# EAGLE board wemos Atmega 32 sensor tes 2 (EAGLE 9.6.2)
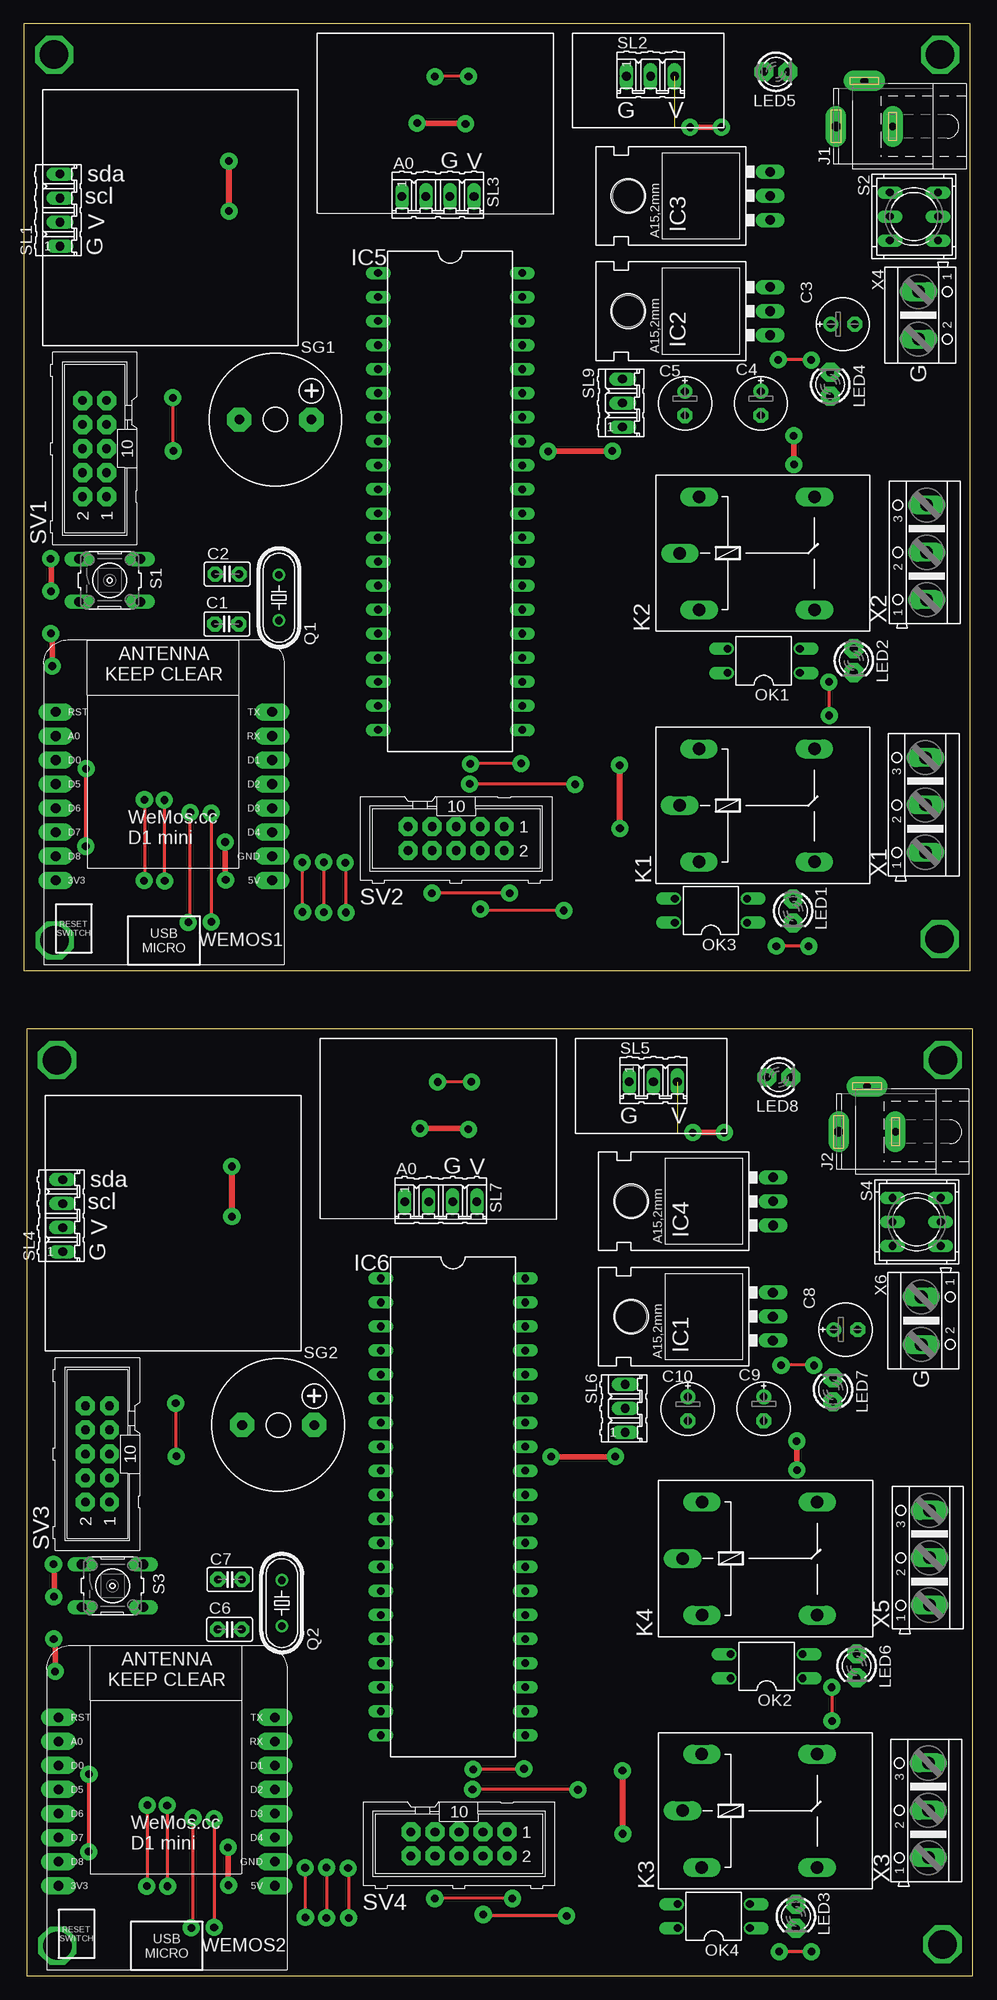
[diagram p0: board, top side]
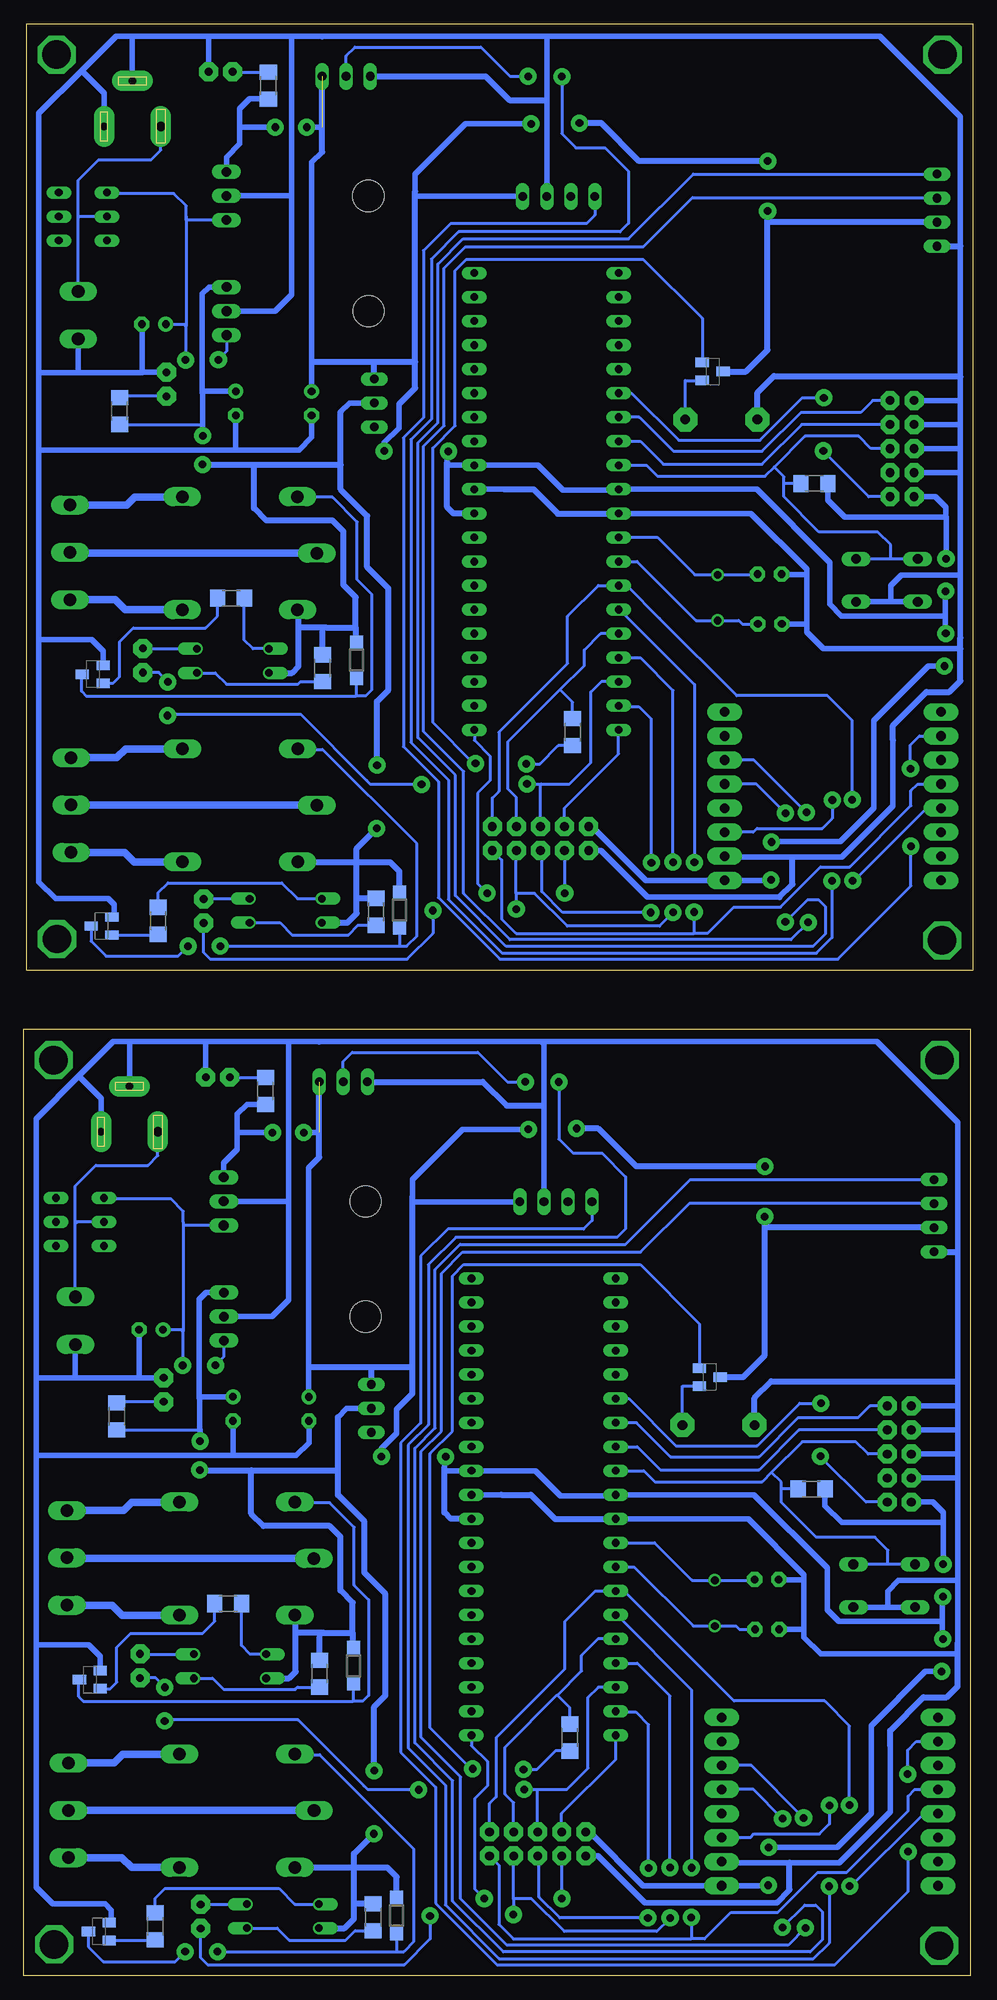
[diagram p1: board, bottom side, seen from below]

Size 100.3 x 206.2 mm. Coordinates in mm from the lower left corner, seen from the top.
Outline: 0,106.2 100,106.2 100,206.2 0,206.2 0,106.2
Outline: 0.3,0 100.3,0 100.3,100 0.3,100 0.3,0
Copper layers (1*16): Top 0.035mm / dielectric 1.5mm / Bottom 0.035mm
Design rules "default *": minimum track width 6mil, minimum drill 0.35mm, track to track 12mil, track to pad 12mil, pad to pad 12mil, via to via 12mil, smd to smd 12mil, copper to edge 40mil, drill to drill 6mil, minimum pad ring 10mil, minimum via ring 8mil, stop-mask expansion 4mil, vias tented up to drill 0mil, thermal gap 10mil

## Footprints (pad centres in the part's own frame; a part is rotated, then mirrored left to right if it is on the bottom)
C2.5-2 = drill 0.813 pad 1.6 octagon: 1 -1.27,0; 2 1.27,0
E2,5-6E = drill 0.813 pad 1.575: + -1.27,0 | drill 0.813 pad 1.575 octagon: - 1.27,0
SOD123 = smd 1.4 x 1.4: A 1.9,0; C -1.9,0
78XXL = drill 1.016 long: GND 0,-3.81; IN -2.54,-3.81; OUT 2.54,-3.81 | hole 3.302: 0,11.176
DIL40 = drill 0.813 long: 1 -24.13,-7.62; 2 -21.59,-7.62; 3 -19.05,-7.62; 4 -16.51,-7.62; 5 -13.97,-7.62; 6 -11.43,-7.62; 7 -8.89,-7.62; 8 -6.35,-7.62; 9 -3.81,-7.62; 10 -1.27,-7.62; 11 1.27,-7.62; 12 3.81,-7.62; 13 6.35,-7.62; 14 8.89,-7.62; 15 11.43,-7.62; 16 13.97,-7.62; 17 16.51,-7.62; 18 19.05,-7.62; 19 21.59,-7.62; 20 24.13,-7.62; 21 24.13,7.62; 22 21.59,7.62; 23 19.05,7.62; 24 16.51,7.62; 25 13.97,7.62; 26 11.43,7.62; 27 8.89,7.62; 28 6.35,7.62; 29 3.81,7.62; 30 1.27,7.62; 31 -1.27,7.62; 32 -3.81,7.62; 33 -6.35,7.62; 34 -8.89,7.62; 35 -11.43,7.62; 36 -13.97,7.62; 37 -16.51,7.62; 38 -19.05,7.62; 39 -21.59,7.62; 40 -24.13,7.62
SPC4078 = drill 0.8 pad 2.184 long: 1 -3,0; 2 0,-4.8 | drill 1 pad 2.184 long: 3 3,0
G5LE = drill 1.321 long: 1 -7.493,-5.969; 2 -7.493,5.969; O 4.699,5.969; P -9.525,0; S 4.699,-5.969
LED3MM = drill 0.813 pad 2 octagon: A -1.27,0; K 1.27,0
DIL04 = drill 0.813 offset: 1 -1.27,-3.81; 2 1.27,-3.81; 3 1.27,3.81; 4 -1.27,3.81
HC49/S = drill 0.813: 1 -2.413,0; 2 2.413,0
R1206 = smd 1.6 x 1.803: 1 -1.422,0; 2 1.422,0
B3F-10XX = drill 1.016 long: 1 -3.251,2.261; 2 3.251,2.261; 3 -3.251,-2.261; 4 3.251,-2.261
9077-2 = drill 0.813 long: 1 -2.54,2.54; 2 0,2.54; 3 2.54,2.54; 4 -2.54,-2.54; 5 0,-2.54; 6 2.54,-2.54
F/CM12P = drill 1.016 pad 2.54 octagon: + 3.81,0; - -3.81,0
04P = drill 0.914 long: 1 -3.81,0; 2 -1.27,0; 3 1.27,0; 4 3.81,0
03P = drill 0.914 long: 1 -2.54,0; 2 0,0; 3 2.54,0
ML10 = drill 0.914 pad 2 octagon: 1 -5.08,-1.27; 2 -5.08,1.27; 3 -2.54,-1.27; 4 -2.54,1.27; 5 0,-1.27; 6 0,1.27; 7 2.54,-1.27; 8 2.54,1.27; 9 5.08,-1.27; 10 5.08,1.27
SOT23-BEC = smd 1 x 1.4: B -0.95,-1.1; C 0,1.1; E 0.95,-1.1
WEMOS-D1-MINI = drill 1.016 pad 1.829 long: 3V3 -10.16,-10.16; 5V 12.7,-10.16; A0 -10.16,5.08; D0 -10.16,2.54; D1 12.7,2.54; D2 12.7,0; D3 12.7,-2.54; D4 12.7,-5.08; D5 -10.16,0; D6 -10.16,-2.54; D7 -10.16,-5.08; D8 -10.16,-7.62; GND 12.7,-7.62; RESET -10.16,7.62; RX 12.7,5.08; TX 12.7,7.62
AK500/3 = drill 1.321 long: 1 -5.004,0; 2 0,0; 3 5.004,0
AK500/2 = drill 1.321 long: 1 -2.515,0; 2 2.515,0

## Placement (x,y rotation side)
C1  22PF  [C2.5-2]  21.46,142.79 0 top
C2  22PF  [C2.5-2]  21.5,148.07 0 top
C3  100uF/16V  [E2,5-6E]  86.55,174.46 0 top
C4  100uF/16V  [E2,5-6E]  77.89,166.09 270 top
C5  100uF/16V  [E2,5-6E]  69.87,166.09 270 top
C6  22PF  [C2.5-2]  21.76,36.59 0 top
C7  22PF  [C2.5-2]  21.8,41.87 0 top
C8  100uF/16V  [E2,5-6E]  86.85,68.26 0 top
C9  100uF/16V  [E2,5-6E]  78.19,59.9 270 top
C10  100uF/16V  [E2,5-6E]  70.17,59.89 270 top
D1  1N4148  [SOD123]  60.59,112.56 270 bottom
D2  1N4148  [SOD123]  65.13,138.96 270 bottom
D3  1N4148  [SOD123]  60.89,6.37 270 bottom
D4  1N4148  [SOD123]  65.43,32.76 270 bottom
IC1  L7805  [78XXL]  75.35,69.63 90 top
IC2  L7805  [78XXL]  75.05,175.83 90 top
IC3  L7805  [78XXL]  75.06,188 90 top
IC4  L7805  [78XXL]  75.36,81.8 90 top
IC5  MEGA32-P  [DIL40]  45.07,155.74 270 top
IC6  MEGA32-P  [DIL40]  45.37,49.54 270 top
J1  VIN 6-12VDC  [SPC4078]  88.82,195.35 180 top
J2  VIN 6-12VDC  [SPC4078]  89.12,89.15 180 top
K1  G5L  [G5LE]  78.84,123.63 0 top
K2  G5L  [G5LE]  78.85,150.27 0 top
K3  G5L  [G5LE]  79.14,17.43 0 top
K4  G5L  [G5LE]  79.15,44.07 0 top
LED1  RED  [LED3MM]  81.29,112.47 270 top
LED2  RED  [LED3MM]  87.7,138.93 270 top
LED3  RED  [LED3MM]  81.59,6.27 270 top
LED4  RED  [LED3MM]  85.21,168.1 90 top
LED5  RED  [LED3MM]  79.49,201.12 0 top
LED6  RED  [LED3MM]  88,32.73 270 top
LED7  RED  [LED3MM]  85.51,61.9 90 top
LED8  RED  [LED3MM]  79.79,94.92 0 top
OK1  [DIL04]  78.19,138.9 90 top
OK2  [DIL04]  78.49,32.7 90 top
OK3  [DIL04]  72.61,112.5 90 top
OK4  [DIL04]  72.91,6.31 90 top
Q1  16MHZ  [HC49/S]  26.97,145.57 90 top
Q2  16MHZ  [HC49/S]  27.27,39.37 90 top
R1  10K  [R1206]  16.76,157.63 0 bottom
R2  1K  [R1206]  68.74,138.12 270 bottom
R3  1K  [R1206]  78.4,145.52 180 bottom
R4  10K  [R1206]  17.06,51.43 0 bottom
R5  1K  [R1206]  42.6,25.17 270 bottom
R6  1K  [R1206]  90.17,165.29 270 bottom
R7  1K  [R1206]  74.45,199.66 270 bottom
R8  1K  [R1206]  63.06,112.39 270 bottom
R9  1K  [R1206]  86.09,111.44 270 bottom
R10  1K  [R1206]  69.04,31.92 270 bottom
R11  1K  [R1206]  78.7,39.32 180 bottom
R12  1K  [R1206]  90.47,59.09 270 bottom
R13  1K  [R1206]  74.75,93.46 270 bottom
R14  1K  [R1206]  63.37,6.19 270 bottom
R15  1K  [R1206]  86.39,5.24 270 bottom
R18  1K  [R1206]  42.3,131.37 270 bottom
S1  RESET  [B3F-10XX]  9.09,147.4 0 top
S2  POWER ON/OFF  [9077-2]  94.05,185.83 90 top
S3  RESET  [B3F-10XX]  9.39,41.2 0 top
S4  POWER ON/OFF  [9077-2]  94.35,79.63 90 top
SG1  BUZZER  [F/CM12P]  26.59,164.38 0 top
SG2  BUZZER  [F/CM12P]  26.89,58.18 0 top
SL1  I2C  [04P]  3.82,186.5 90 top
SL2  DHT22  [03P]  66.23,200.64 0 top
SL3  MQ135  [04P]  43.76,187.96 0 top
SL4  I2C  [04P]  4.12,80.3 90 top
SL5  DHT22  [03P]  66.53,94.44 0 top
SL6  SWITCH POWER  [03P]  63.56,59.94 90 top
SL7  MQ135  [04P]  44.06,81.76 0 top
SL9  SWITCH POWER  [03P]  63.27,166.13 90 top
SV1  ISP PORT  [ML10]  7.49,161.32 90 top
SV2  PORTD  [ML10]  45.7,120.13 180 top
SV3  ISP PORT  [ML10]  7.79,55.12 90 top
SV4  PORTD  [ML10]  45.99,13.93 180 top
T1  -  [SOT23-BEC]  92.07,110.89 90 bottom
T2  -  [SOT23-BEC]  93,137.48 90 bottom
T3  C9013  [SOT23-BEC]  27.5,169.46 270 bottom
T4  -  [SOT23-BEC]  92.37,4.69 90 bottom
T5  -  [SOT23-BEC]  93.3,31.28 90 bottom
T6  C9013  [SOT23-BEC]  27.8,63.26 270 bottom
WEMOS1  D1 MINI  [WEMOS-D1-MINI]  13.55,125.88 0 top
WEMOS2  D1 MINI  [WEMOS-D1-MINI]  13.85,19.68 0 top
X1  OUT  [AK500/3]  95.28,123.67 90 top
X2  OUT  [AK500/3]  95.41,150.36 90 top
X3  OUT  [AK500/3]  95.58,17.47 90 top
X4  VIN 6-12VDC  [AK500/2]  94.54,175.4 270 top
X5  OUT  [AK500/3]  95.71,44.16 90 top
X6  VIN 6-12VDC  [AK500/2]  94.84,69.2 270 top

## Library data of the parts
C1 C2 C6 C7 = capacitor-wima
C3-C5 C8-C10 = rcl; SPICEPREFIX: C
D1-D4 = diode
IC1-IC4 = v-reg
IC5 IC6 = atmel; MPN: ATMEGA32-16PU; OC_FARNELL: 1661729; OC_NEWARK: 51P1794
J1 J2 = con-jack; OC_FARNELL: unknown; OC_NEWARK: unknown
K1-K4 = relay; OC_FARNELL: unknown; OC_NEWARK: unknown
LED1-LED8 = led3mm_new
OK1-OK4 = optocoupler; MPN: PC817X4J000F; OC_FARNELL: 9707727; OC_NEWARK: 97K7059
Q1 Q2 = crystal; OC_FARNELL: 1667008; OC_NEWARK: unknown
R1-R15 R18 = rcl; SPICEPREFIX: R
S1 S3 = switch-omron; MPN: B3F-1000; OC_FARNELL: 176432; OC_NEWARK: 36M3542
S2 S4 = switch-misc
SG1 SG2 = buzzer; OC_FARNELL: unknown; OC_NEWARK: unknown
SL1-SL7 SL9 = con-amp-quick; OC_FARNELL: unknown; OC_NEWARK: unknown
SV1-SV4 = con-mlnew; OC_FARNELL: unknown; OC_NEWARK: unknown
T1-T6 = transistor
WEMOS1 WEMOS2 = Eagle Mixed Library
X1-X6 = con-ptr500; OC_FARNELL: unknown; OC_NEWARK: unknown

## Nets
5V: C5.+ IC3.OUT IC5.10 IC5.30 IC5.32 R1.2 R7.2 SL1.2 SL2.3 SL3.4 SL9.3 SV1.2 SV2.9 T3.C WEMOS1.5V
5V1: C10.+ IC4.OUT IC6.10 IC6.30 IC6.32 R4.2 R13.2 SL4.2 SL5.3 SL6.3 SL7.4 SV3.2 SV4.9 T6.C WEMOS2.5V
5VA: C4.+ D1.C D2.C IC2.OUT K1.1 K2.1 OK1.4 OK3.4 R2.1 R6.2 R8.1 SL9.2
5VA1: C9.+ D3.C D4.C IC1.OUT K3.1 K4.1 OK2.4 OK4.4 R10.1 R12.2 R14.1 SL6.2
A0: SL3.1 WEMOS1.A0
A1: SL7.1 WEMOS2.A0
D1: SL1.3 WEMOS1.D1
D2: SL1.4 WEMOS1.D2
D3: SL4.3 WEMOS2.D1
D4: SL2.2 WEMOS1.D4
D5: SL4.4 WEMOS2.D2
D6: SL5.2 WEMOS2.D4
GND: C1.1 C2.1 C3.- C4.- C5.- IC2.GND IC3.GND IC5.11 IC5.31 J1.1 J1.2 LED4.K LED5.K S1.3 S1.4 SG1.- SL1.1 SL2.1 SL3.3 SV1.4 SV1.6 SV1.8 SV1.10 SV2.10 T1.E T2.E WEMOS1.GND X4.2
GND1: C6.1 C7.1 C8.- C9.- C10.- IC1.GND IC4.GND IC6.11 IC6.31 J2.1 J2.2 LED7.K LED8.K S3.3 S3.4 SG2.- SL4.1 SL5.1 SL7.3 SV3.4 SV3.6 SV3.8 SV3.10 SV4.10 T4.E T5.E WEMOS2.GND X6.2
MISO: IC5.7 SV1.9
MISO1: IC6.7 SV3.9
MOSI: IC5.6 SV1.1
MOSI1: IC6.6 SV3.1
N$1: J1.3 S2.2 X4.1
N$2: C3.+ IC2.IN IC3.IN S2.3
N$4: C2.2 IC5.12 Q1.2
N$5: LED4.A R6.1
N$8: LED5.A R7.1
N$10: C1.2 IC5.13 Q1.1
N$11: R18.2 T3.B
N$12: J2.3 S4.2 X6.1
N$13: C8.+ IC1.IN IC4.IN S4.3
N$14: SG1.+ T3.E
N$15: LED7.A R12.1
N$16: LED8.A R13.1
N$17: R5.2 T6.B
N$18: OK3.1 R8.2
N$19: LED1.A OK3.2
N$20: SG2.+ T6.E
N$21: OK4.1 R14.2
N$22: OK3.3 R9.1
N$23: R9.2 T1.B
N$24: LED3.A OK4.2
N$25: D1.A K1.2 T1.C
N$26: OK4.3 R15.1
N$27: D2.A K2.2 T2.C
N$28: R15.2 T4.B
N$29: R3.2 T2.B
N$30: OK1.3 R3.1
N$31: OK1.1 R2.2
N$32: LED2.A OK1.2
N$33: D3.A K3.2 T4.C
N$34: K2.P X2.2
N$35: K2.O X2.3
N$36: K2.S X2.1
N$37: K1.O X1.3
N$38: K1.S X1.1
N$39: K1.P X1.2
N$40: D4.A K4.2 T5.C
N$41: R11.2 T5.B
N$42: OK2.3 R11.1
N$43: OK2.1 R10.2
N$44: LED6.A OK2.2
N$45: K4.P X5.2
N$46: K4.O X5.3
N$47: K4.S X5.1
N$48: K3.O X3.3
N$49: K3.S X3.1
N$50: K3.P X3.2
N$55: C7.2 IC6.12 Q2.2
N$56: C6.2 IC6.13 Q2.1
PD0: IC5.14 SV2.1 WEMOS1.D6
PD1: IC5.15 SV2.2 WEMOS1.D5
PD2: IC5.16 R18.1 SV2.3
PD3: IC5.17 LED1.K SV2.4
PD4: IC5.18 LED2.K SV2.5
PD5: IC5.19 SV2.6
PD6: IC5.20 SV2.7
PD7: IC5.21 SV2.8
PD8: IC6.18 LED6.K SV4.5
PD9: IC6.17 LED3.K SV4.4
PD10: IC6.16 R5.1 SV4.3
PD11: IC6.14 SV4.1 WEMOS2.D6
PD12: IC6.15 SV4.2 WEMOS2.D5
PD13: IC6.19 SV4.6
PD14: IC6.20 SV4.7
PD15: IC6.21 SV4.8
RST: IC5.9 R1.1 S1.1 S1.2 SV1.5
RST1: IC6.9 R4.1 S3.1 S3.2 SV3.5
SCK: IC5.8 SV1.7
SCK1: IC6.8 SV3.7

## Tracks (layer width: path | path; a pad name or v marks a point on that pad's centre or on a via)
5V  (via drill 0.8 pad 1.8)  (1 unrouted)
  Top 0.6: v70.4,195.26 v73.72,195.26 | v21.29,119.76 21.29,115.82 v21.34,115.77 | v2.87,141.78 3.02,141.64 v3.02,138.34 | v2.88,146.25 2.91,146.28 2.91,149.61 v2.85,149.68 | v41.58,195.7 46.59,195.7 v46.68,195.61 | v62.2,161.06 62.18,161.04 55.44,161.04 v55.42,161.02
  Top 0.61: v21.7,186.4 21.7,191.68 v21.68,191.69
  Bottom 0.6: IC3.OUT 78.87,192.09 77.46,193.49 77.46,195.17 | 77.46,195.17 77.46,197.21 76.41,198.26 74.47,198.26 R7.2 | 68.77,195.26 v70.4,195.26 | v73.72,195.26 77.37,195.26 77.46,195.17 | C5.+ 69.87,170.46 69.87,191.55 68.79,192.63 | SV2.9 40.23,121.4 34.55,115.72 WEMOS1.5V 21.39,115.72 v21.34,115.77 | v21.29,119.76 21.25,119.79 14.02,119.79 10.46,123.35 10.46,132.6 4.72,138.34 v3.02,138.34 | v2.87,141.78 2.92,141.84 2.92,143.64 | v2.88,146.25 2.92,146.21 2.92,143.64 | v2.85,149.68 2.85,154.08 2.87,154.08 | 2.87,154.08 2.87,155.13 3.97,156.24 5.07,156.24 SV1.2 | 2.92,143.64 13.89,143.64 15.11,144.87 15.11,149.29 22.83,157.01 IC5.10 37.54,156.91 43.3,156.91 45.94,159.55 IC5.32 55.56,159.55 55.56,159.87 55.56,160.88 v55.42,161.02 | v46.68,195.61 53.61,195.61 58.93,190.3 58.93,188.49 58.93,188.13 58.76,187.96 SL3.4 | 58.93,167.72 60.63,166.02 60.63,163.5 62.2,161.93 v62.2,161.06 | R1.2 15.34,155.86 13.56,154.08 2.87,154.08
  Bottom 0.61: IC5.30 54.9,154.47 55.56,155.13 55.56,159.87 | 63.31,170.46 69.87,170.46 | SL9.3 63.27,170.42 63.31,170.46 | 58.93,170.46 63.31,170.46 | 58.93,167.72 58.93,170.46 | 58.93,170.46 58.93,188.49 | T3.C 23.98,169.46 21.7,171.74 21.7,185.29 | 21.7,185.29 v21.7,186.4 | v21.68,191.69 35.27,191.69 39.28,195.7 v41.58,195.7 | SL1.2 21.63,185.23 21.7,185.29 | 68.79,192.63 68.77,192.65 SL2.3
5V1  (via drill 0.8 pad 1.8)  (1 unrouted)
  Top 0.6: v70.7,89.06 v74.02,89.06 | v21.59,13.56 21.59,9.62 v21.64,9.57 | v3.17,35.58 3.32,35.44 v3.32,32.14 | v3.18,40.05 3.21,40.08 3.21,43.41 v3.15,43.48 | v41.88,89.5 46.89,89.5 v46.98,89.41 | v62.5,54.86 62.48,54.84 55.74,54.84 v55.72,54.82
  Top 0.61: v22,80.2 22,85.47 v21.98,85.5
  Bottom 0.6: IC4.OUT 79.17,85.89 77.76,87.29 77.76,88.97 | 77.76,88.97 77.76,91.01 76.71,92.06 74.77,92.06 R13.2 | 69.07,89.06 v70.7,89.06 | v74.02,89.06 77.67,89.06 77.76,88.97 | C10.+ 70.17,64.26 70.17,85.35 69.09,86.43 | SV4.9 40.53,15.2 34.85,9.52 WEMOS2.5V 21.69,9.52 v21.64,9.57 | v21.59,13.56 21.55,13.59 14.32,13.59 10.76,17.15 10.76,26.4 5.02,32.14 v3.32,32.14 | v3.17,35.58 3.23,35.64 3.23,37.44 | v3.18,40.05 3.23,40.01 3.23,37.44 | v3.15,43.48 3.15,47.88 3.17,47.88 | 3.17,47.88 3.17,48.93 4.27,50.04 5.37,50.04 SV3.2 | 3.23,37.44 14.19,37.44 15.41,38.67 15.41,43.09 23.13,50.81 IC6.10 37.84,50.71 43.6,50.71 46.24,53.35 IC6.32 55.86,53.35 55.86,53.67 55.86,54.68 v55.72,54.82 | v46.98,89.41 53.91,89.41 59.23,84.1 59.23,82.29 59.23,81.93 59.06,81.76 SL7.4 | 59.23,61.52 60.93,59.82 60.93,57.3 62.5,55.73 v62.5,54.86 | R4.2 15.63,49.66 13.86,47.88 3.17,47.88
  Bottom 0.61: IC6.30 55.2,48.27 55.86,48.93 55.86,53.67 | 63.61,64.26 70.17,64.26 | SL6.3 63.56,64.22 63.61,64.26 | 59.23,64.26 63.61,64.26 | 59.23,61.52 59.23,64.26 | 59.23,64.26 59.23,82.29 | T6.C 24.28,63.26 22,65.54 22,79.09 | 22,79.09 v22,80.2 | v21.98,85.5 35.57,85.5 39.58,89.5 v41.88,89.5 | SL4.2 21.93,79.03 22,79.09 | 69.09,86.43 69.07,86.45 SL5.3
5VA  (via drill 0.8 pad 1.8)
  Top 0.6: v81.37,162.68 81.39,162.65 v81.39,159.64
  Top 0.61: v63,121.2 63,127.83
  Top 0.813: 63,127.83 v62.96,127.87
  Bottom 0.3: R6.2 81.39,163.87 | 71.26,144.2 K2.1 | 68.74,141.95 68.28,142.4
  Bottom 0.6: C4.+ 81.32,167.37 81.4,167.29 | IC2.OUT 80.73,178.37 81.44,177.66 81.44,167.25 81.4,167.29 | SL9.2 65.87,166.13 66.8,165.2 | 71.3,117.62 K1.1 | 65.1,113.76 65.05,113.81 | v81.37,162.68 81.37,163.87 81.39,163.87 81.4,163.87 81.4,167.29
  Bottom 0.61: OK3.4 66.09,111.23 65.1,112.22 65.1,113.76 65.1,117.59 65.1,119.1 v63,121.2 | R8.1 65.05,113.81 | D1.C 60.59,116.65 61.56,117.62 65.13,117.62 71.3,117.62 | v81.39,159.64 81.36,159.6 75.97,159.6 | OK1.4 71.96,137.63 71.26,138.34 71.26,142.4 | 71.26,142.4 71.26,144.2 | 65.23,142.4 68.28,142.4 71.26,142.4 | 65.23,142.4 65.23,140.96 | R2.1 68.74,141.95 | v62.96,127.87 62.96,134.62 61.77,135.81 61.77,146.55 63.99,148.77 63.99,154.19 66.8,156.99 66.8,159.59 | 66.8,159.59 66.8,165.2 | 66.8,159.59 66.81,159.6 75.97,159.6 | 65.23,142.4 65.23,145.61 66.52,146.9 66.52,152.57 67.67,153.72 74.67,153.72 75.97,155.02 75.97,159.6
  Bottom 0.813: D2.C 65.23,140.96 | 65.1,117.59 65.13,117.62
5VA1  (via drill 0.8 pad 1.8)
  Top 0.6: v81.67,56.48 81.69,56.45 v81.69,53.44
  Top 0.61: v63.3,15 63.3,21.63
  Top 0.813: 63.3,21.63 v63.26,21.67
  Bottom 0.3: R12.2 81.69,57.67 | 71.56,38 K4.1 | 69.04,35.75 68.58,36.2
  Bottom 0.6: C9.+ 81.62,61.17 81.7,61.09 | IC1.OUT 81.03,72.17 81.74,71.46 81.74,61.05 81.7,61.09 | SL6.2 66.17,59.94 67.1,59 | 71.6,11.42 K3.1 | 65.4,7.56 65.35,7.61 | v81.67,56.48 81.67,57.67 81.69,57.67 81.7,57.67 81.7,61.09
  Bottom 0.61: OK4.4 66.39,5.03 65.4,6.02 65.4,7.56 65.4,11.39 65.4,12.9 v63.3,15 | R14.1 65.35,7.61 | D3.C 60.89,10.45 61.86,11.42 65.43,11.42 71.6,11.42 | v81.69,53.44 81.66,53.4 76.27,53.4 | OK2.4 72.26,31.43 71.56,32.14 71.56,36.2 | 71.56,36.2 71.56,38 | 65.53,36.2 68.58,36.2 71.56,36.2 | 65.53,36.2 65.53,34.76 | R10.1 69.04,35.75 | v63.26,21.67 63.26,28.42 62.07,29.61 62.07,40.35 64.3,42.57 64.3,47.99 67.1,50.79 67.1,53.39 | 67.1,53.39 67.1,59 | 67.1,53.39 67.11,53.4 76.27,53.4 | 65.53,36.2 65.53,39.41 66.82,40.7 66.82,46.37 67.97,47.52 74.97,47.52 76.27,48.82 76.27,53.4
  Bottom 0.813: D4.C 65.53,34.76 | 65.4,11.39 65.43,11.42
A0  (via drill 0.8 pad 1.8)
  Top 0.305: v6.56,119.31 6.56,127.46 v6.6,127.5
  Bottom 0.305: SL3.1 39.95,185.97 40.84,185.09 55.19,185.09 58.05,182.22 58.05,164.58 60.17,162.47 60.17,129.82 56.48,126.13 56.48,113.87 50,107.39 14.28,107.39 6.56,115.11 v6.56,119.31 | v6.6,127.5 6.6,130.02 5.67,130.96 WEMOS1.A0
A1  (via drill 0.8 pad 1.8)
  Top 0.305: v6.86,13.11 6.86,21.26 v6.9,21.3
  Bottom 0.305: SL7.1 40.25,79.77 41.14,78.89 55.49,78.89 58.35,76.02 58.35,58.38 60.47,56.27 60.47,23.62 56.78,19.93 56.78,7.67 50.3,1.19 14.58,1.19 6.86,8.91 v6.86,13.11 | v6.9,21.3 6.9,23.82 5.96,24.76 WEMOS2.A0
D1  (via drill 0.8 pad 1.8)
  Top 0.305: v17.6,122.88 17.6,122.71 17.56,122.68 17.56,111.43 v17.4,111.27
  Bottom 0.305: WEMOS1.D1 23.13,128.42 v17.6,122.88 | v17.4,111.27 19.23,109.44 48.94,109.44 53.82,114.33 53.82,127.21 58.03,131.41 58.03,161.58 55.88,163.73 55.88,180.39 53.62,182.64 34.82,182.64 29.63,187.83 3.88,187.83 SL1.3
D2  (via drill 0.8 pad 1.8)
  Top 0.305: v19.82,111.32 v19.83,111.33 19.83,122.8 v19.82,122.81
  Bottom 0.305: v19.82,122.81 22.89,125.88 WEMOS1.D2 | v19.82,111.32 17.47,113.67 16.32,113.67 15.6,112.95 15.6,110.03 16.9,108.73 49.33,108.73 54.68,114.09 54.68,126.82 58.66,130.79 58.66,161.93 56.53,164.06 56.53,180.81 53.87,183.47 36.4,183.47 29.56,190.31 SL1.4
D3  (via drill 0.8 pad 1.8)
  Top 0.305: v17.9,16.68 17.9,16.51 17.86,16.48 17.86,5.23 v17.7,5.07
  Bottom 0.305: WEMOS2.D1 23.43,22.22 v17.9,16.68 | v17.7,5.07 19.53,3.24 49.24,3.24 54.12,8.12 54.12,21.01 58.33,25.21 58.33,55.38 56.17,57.53 56.17,74.19 53.92,76.44 35.12,76.44 29.93,81.63 4.18,81.63 SL4.3
D4  (via drill 0.8 pad 1.8)
  Top 0.305: v47,200.63 43.47,200.63 v43.45,200.61 | v14.87,124.2 14.87,115.69 v14.89,115.66
  Bottom 0.305: v47,200.63 v47.01,200.64 48.9,200.64 52,203.73 65.3,203.73 66.23,202.8 SL2.2 | v43.45,200.61 43.45,194.58 41.96,193.09 38.88,193.09 36.4,190.61 36.4,185.12 37.3,184.21 54.34,184.21 57.23,181.32 57.23,164.41 59.38,162.26 59.38,130.27 55.44,126.33 55.44,113.69 49.75,108.01 16.55,108.01 14.89,109.66 v14.89,115.66 | v14.87,124.2 14.87,122.25 15.93,121.19 22.83,121.19 23.22,120.8 WEMOS1.D4
D5  (via drill 0.8 pad 1.8)
  Top 0.305: v20.12,5.12 v20.13,5.12 20.13,16.6 v20.12,16.61
  Bottom 0.305: v20.12,16.61 23.19,19.68 WEMOS2.D2 | v20.12,5.12 17.77,7.48 16.62,7.48 15.9,6.75 15.9,3.83 17.2,2.53 49.63,2.53 54.98,7.89 54.98,20.62 58.96,24.59 58.96,55.73 56.83,57.86 56.83,74.61 54.17,77.27 36.7,77.27 29.86,84.11 SL4.4
D6  (via drill 0.8 pad 1.8)
  Top 0.305: v47.3,94.43 43.77,94.43 v43.75,94.41 | v15.16,18 15.16,9.49 v15.19,9.46
  Bottom 0.305: v47.3,94.43 v47.31,94.44 49.2,94.44 52.3,97.53 65.6,97.53 66.53,96.6 SL5.2 | v43.75,94.41 43.75,88.38 42.26,86.89 39.18,86.89 36.7,84.41 36.7,78.92 37.6,78.01 54.64,78.01 57.52,75.12 57.52,58.21 59.67,56.06 59.67,24.07 55.73,20.13 55.73,7.49 50.05,1.81 16.84,1.81 15.19,3.46 v15.19,9.46 | v15.16,18 15.16,16.05 16.23,14.98 23.13,14.98 23.52,14.6 WEMOS2.D4
GND
  Bottom 0.6: 88.89,204.88 90.53,204.88 94.19,201.23 | 88.89,204.88 80.85,204.88 | 80.85,204.88 72,204.88 | 72,204.88 68.7,204.88 | 68.7,204.88 45.28,204.88 | 45.28,204.88 9.86,204.88 1.32,196.34 1.32,190.32 1.33,190.31 1.32,190.3 1.32,182.7 1.32,168.87 1.32,166.44 | 1.33,141.33 1.33,147.97 | 8.46,130.52 8.46,123.54 13.85,118.16 19.08,118.16 26.15,118.16 WEMOS1.GND | 68.77,204.81 68.7,204.88 | 72,204.88 72,188.06 | 72,188.06 72,177.57 73.73,175.83 IC2.GND | IC3.GND 72.05,188 72,188.06 | J1.2 88.82,204.81 88.89,204.88 | 94.19,201.23 98.68,196.73 98.68,169.34 | C3.- 87.79,174.43 87.79,169.41 | LED4.K 87.83,169.37 87.79,169.41 | LED5.K 80.76,204.8 80.85,204.88 | 77.97,161.15 71.22,161.15 69.86,162.51 C5.- | C4.- 77.89,161.23 77.97,161.15 | J1.1 91.82,198.86 94.19,201.23 | 98.68,141.16 98.68,115.53 96.94,113.79 91.39,113.79 90.76,113.15 90.76,112.05 T1.E | SV2.10 39.31,118.86 34.38,113.93 20.44,113.93 | T2.E 91.9,139.93 93.13,141.16 98.68,141.16 | IC5.31 49.52,157.01 | SL3.3 45.03,198.16 45.03,204.63 45.28,204.88 | 17.56,148.01 17.56,148.58 23.45,154.47 IC5.11 | 17.56,148.01 17.56,142.81 | 17.56,142.81 17.56,141.96 15.79,140.19 1.33,140.19 | X4.2 94.54,169.34 | 87.79,169.41 87.79,169.34 94.54,169.34 | 94.54,169.34 98.68,169.34 | 98.68,169.34 98.68,161.2 | 98.68,161.2 98.68,141.16 | 98.68,161.2 98.63,161.15 77.97,161.15 | S1.4 8.7,145.14 | 8.7,145.14 S1.3 | 8.7,145.14 8.7,146.84 7.57,147.97 1.33,147.97 | 1.33,147.97 1.32,147.97 1.32,158.74 | C2.1 20.17,148.01 17.56,148.01 | C1.1 17.57,142.79 17.56,142.81 | 1.32,158.74 1.32,161.32 | 1.32,161.32 1.32,163.86 | 1.32,163.86 1.32,166.44 | SV1.4 1.36,158.78 1.32,158.74 | SV1.6 1.32,161.32
  Bottom 0.6: SV1.8 1.33,163.86 1.32,163.86 | SV1.10 1.36,166.4 1.32,166.44
  Bottom 0.61: SG1.- 22.78,167.23 21.01,168.99 1.45,168.99 1.32,168.87 | 1.33,141.33 1.33,140.19 1.33,136.78 2.49,135.62 4.93,135.62 8.46,132.09 8.46,130.52 | 49.52,157.01 46.42,157.01 43.85,154.44 37.47,154.44 IC5.11 | 20.44,113.93 19.08,115.29 19.08,118.16 | SL1.1 1.36,182.69 1.32,182.72 1.32,182.7 | SL2.1 51.5,200.64 48.98,198.12 45.08,198.12 45.03,198.16
GND1
  Bottom 0.6: 89.19,98.68 90.83,98.68 94.49,95.03 | 89.19,98.68 81.15,98.68 | 81.15,98.68 72.3,98.68 | 72.3,98.68 69,98.68 | 69,98.68 45.58,98.68 | 45.58,98.68 10.16,98.68 1.62,90.15 1.62,84.12 1.64,84.11 1.62,84.09 1.62,76.5 1.62,62.67 1.62,60.24 | 1.63,35.13 1.63,41.77 | 8.76,24.32 8.76,17.34 14.15,11.96 19.38,11.96 26.45,11.96 WEMOS2.GND | 69.07,98.61 69,98.68 | 72.3,98.68 72.3,81.86 | 72.3,81.86 72.3,71.37 74.03,69.63 IC1.GND | IC4.GND 72.35,81.8 72.3,81.86 | J2.2 89.12,98.62 89.19,98.68 | 94.49,95.03 98.98,90.53 98.98,63.14 | C8.- 88.09,68.23 88.09,63.21 | LED7.K 88.13,63.17 88.09,63.21 | LED8.K 81.06,98.59 81.15,98.68 | 78.27,54.95 71.52,54.95 70.16,56.31 C10.- | C9.- 78.19,55.03 78.27,54.95 | J2.1 92.12,92.66 94.49,95.03 | 98.98,34.96 98.98,9.33 97.24,7.59 91.69,7.59 91.06,6.95 91.06,5.85 T4.E | SV4.10 39.61,12.66 34.68,7.73 20.74,7.73 | T5.E 92.2,33.73 93.43,34.96 98.98,34.96 | IC6.31 49.82,50.81 | SL7.3 45.33,91.96 45.33,98.44 45.58,98.68 | 17.86,41.81 17.86,42.38 23.75,48.27 IC6.11 | 17.86,41.81 17.86,36.61 | 17.86,36.61 17.86,35.76 16.09,33.99 1.63,33.99 | X6.2 94.84,63.14 | 88.09,63.21 88.09,63.14 94.84,63.14 | 94.84,63.14 98.98,63.14 | 98.98,63.14 98.98,55 | 98.98,55 98.98,34.96 | 98.98,55 98.93,54.95 78.27,54.95 | S3.4 9,38.94 | 9,38.94 S3.3 | 9,38.94 9,40.64 7.87,41.77 1.63,41.77 | 1.63,41.77 1.62,41.77 1.62,52.54 | C7.1 20.47,41.81 17.86,41.81 | C6.1 17.88,36.59 17.86,36.61 | 1.62,52.54 1.62,55.12 | 1.62,55.12 1.62,57.66 | 1.62,57.66 1.62,60.24 | SV3.4 1.66,52.58 1.62,52.54 | SV3.6 1.62,55.12 | SV3.8 1.63,57.66 1.62,57.66 | SV3.10 1.66,60.2 1.62,60.24
  Bottom 0.61: SG2.- 23.08,61.03 21.31,62.79 1.75,62.79 1.62,62.67 | 1.63,35.13 1.63,33.99 1.63,30.58 2.79,29.42 5.23,29.42 8.76,25.89 8.76,24.32 | 49.82,50.81 46.72,50.81 44.15,48.24 37.77,48.24 IC6.11 | 20.74,7.73 19.38,9.09 19.38,11.96 | SL4.1 1.66,76.49 1.62,76.52 1.62,76.5 | SL5.1 51.8,94.44 49.28,91.92 45.38,91.92 45.33,91.96
MISO
  Bottom 0.305: SV1.9 10.6,166.4 11.86,165.14 18.19,165.14 22.29,161.03 31.65,161.03 35.25,164.63 IC5.7
MISO1
  Bottom 0.305: SV3.9 10.9,60.2 12.16,58.94 18.49,58.94 22.59,54.83 31.95,54.83 35.55,58.43 IC6.7
MOSI  (via drill 0.8 pad 1.8)
  Top 0.3: v15.82,161.07 15.82,166.68 v15.76,166.68
  Bottom 0.3: v15.76,166.68 18.01,166.68 22.5,162.19 31.09,162.19 36.08,167.17 IC5.6 | SV1.1 11.01,156.24 15.82,161.04 v15.82,161.07
MOSI1  (via drill 0.8 pad 1.8)
  Top 0.3: v16.12,54.87 16.12,60.48 v16.06,60.48
  Bottom 0.3: v16.06,60.48 18.31,60.48 22.8,55.99 31.39,55.99 36.38,60.97 IC6.6 | SV3.1 11.31,50.04 16.12,54.84 v16.12,54.87
N$1
  Bottom 0.3: X4.1 94.54,185.65 | 94.54,185.65 94.54,189.65 92.38,191.81 86.85,191.81 85.82,192.84 J1.3 | S2.2 94.36,185.83 94.54,185.65
N$2  (via drill 0.8 pad 1.8)
  Top 0.3: v83.2,170.67 83.17,170.71 79.74,170.71 v79.72,170.69
  Bottom 0.3: IC2.IN 78.86,171.59 79.71,170.74 v79.71,170.69 v79.72,170.69 | v83.2,170.67 83.2,174.23 83.13,174.3 83.13,174.46 C3.+ | S2.3 91.41,188.27 84.43,188.27 83.12,186.96 83.12,185.81 83.12,185.46 IC3.IN
  Bottom 0.305: 83.12,185.81 83.13,185.8 83.13,174.3
N$3  (via drill 3)
  other vias: 96.83,202.93
N$4
  Bottom 0.3: IC5.12 37.43,151.95 33.35,151.95 29.39,147.98 Q1.2 22.85,147.98 C2.2
N$5
  Bottom 0.3: LED4.A 90.04,166.83 R6.1
N$6  (via drill 3)
  other vias: 3.22,202.93
N$7  (via drill 3)
  other vias: 3.27,109.37
N$8
  Bottom 0.3: LED5.A 78.18,201.08 R7.1
N$9  (via drill 3)
  other vias: 96.78,109.51
N$10
  Bottom 0.3: IC5.13 35.5,149.39 29.26,143.15 Q1.1 24.74,143.16 24.37,142.79 C1.2
N$11  (via drill 0.8 pad 1.8)
  Top 0.3: v52.56,128.06 52.53,128.03 47.22,128.03 v47.19,128.01
  Bottom 0.3: v47.19,128.01 45.77,128.01 43.83,129.95 R18.2
  Bottom 0.305: v52.56,128.06 52.75,128.06 57.06,132.38 57.06,161.38 54.71,163.73 54.71,180.12 53.52,181.32 34.86,181.32 28.61,175.07 28.61,170.42 T3.B
N$12
  Bottom 0.3: X6.1 94.84,79.45 | 94.84,79.45 94.84,83.45 92.68,85.61 87.15,85.61 86.12,86.64 J2.3 | S4.2 94.66,79.63 94.84,79.45
N$13  (via drill 0.8 pad 1.8)
  Top 0.3: v83.5,64.47 83.47,64.51 80.04,64.51 v80.03,64.49
  Bottom 0.3: IC1.IN 79.16,65.4 80.01,64.54 80.01,64.49 v80.03,64.49 | v83.5,64.47 83.5,68.03 83.43,68.1 83.43,68.26 C8.+ | S4.3 91.71,82.07 84.73,82.07 83.42,80.76 83.42,79.62 83.42,79.61 83.42,79.26 IC4.IN
  Bottom 0.305: 83.42,79.61 83.43,79.6 83.43,68.1
N$14
  Bottom 0.305: SG1.+ 30.4,168.51 T3.E
N$15
  Bottom 0.3: LED7.A 90.34,60.63 R12.1
N$16
  Bottom 0.3: LED8.A 78.48,94.88 R13.1
N$17  (via drill 0.8 pad 1.8)
  Top 0.3: v52.87,21.87 52.83,21.83 47.52,21.83 v47.49,21.81
  Bottom 0.3: v47.49,21.81 46.07,21.81 44.13,23.75 R5.2
  Bottom 0.305: v52.87,21.87 53.05,21.87 57.36,26.18 57.36,55.18 55.01,57.53 55.01,73.92 53.82,75.12 35.16,75.12 28.91,68.87 28.91,64.22 T6.B
N$18
  Bottom 0.3: OK3.1 73.22,111.23 71.94,109.96 65.98,109.96 64.97,110.97 R8.2
N$19
  Bottom 0.3: LED1.A 81.25,113.78 76.43,113.78 OK3.2
N$20
  Bottom 0.305: SG2.+ 30.7,62.31 T6.E
N$21
  Bottom 0.3: OK4.1 73.52,5.03 72.24,3.76 66.28,3.76 65.27,4.77 R14.2
N$22
  Bottom 0.3: OK3.3 71.37,113.78 73.03,115.44 85.06,115.44 86.09,114.41 R9.1
N$23
  Bottom 0.3: T1.B 86.17,109.94 R9.2
N$24
  Bottom 0.3: LED3.A 81.56,7.58 OK4.2
N$25  (via drill 0.8 pad 1.8)
  Top 0.3: v82.94,108.75 79.53,108.75 v79.52,108.76
  Bottom 0.3: T1.C 93.17,109.28 91.58,107.7 83.99,107.7 v82.94,108.75 | K1.2 71.35,129.55 68.73,129.55 58.76,119.57 | v79.52,108.76 79.36,108.76 79.35,108.77 60.59,108.77 | 60.59,108.77 59.84,108.77 58.76,109.85 | D1.A 60.59,108.77
  Bottom 0.305: 58.76,109.85 58.76,119.57
N$26
  Bottom 0.3: OK4.3 71.67,7.58 73.33,9.24 85.36,9.24 86.39,8.21 R15.1
N$27
  Bottom 0.3: T2.C 94.18,137.4 94.18,135.68 93.7,135.2 65.2,135.2 | K2.2 71.3,156.18 67.68,156.18 65.07,153.57 65.07,147.47 63.54,145.94 63.54,135.83 64.17,135.2 65.2,135.2 | D2.A 65.2,136.99 65.2,135.2
N$28
  Bottom 0.3: T4.B 86.47,3.74 R15.2
N$29
  Bottom 0.3: T2.B 90.85,136.53 90.16,137.22 90.16,140.91 88.71,142.37 81.1,142.37 79.82,143.65 R3.2
N$30
  Bottom 0.3: OK1.3 76.08,140.17 76.99,141.08 76.99,145.5 R3.1
N$31
  Bottom 0.3: OK1.1 80.06,137.63 78.86,136.44 71.31,136.44 71.05,136.69 R2.2
N$32
  Bottom 0.3: LED2.A 87.67,140.17 OK1.2
N$33  (via drill 0.8 pad 1.8)
  Top 0.3: v83.24,2.55 79.83,2.55 v79.82,2.56
  Bottom 0.3: T4.C 93.47,3.08 91.89,1.5 84.29,1.5 v83.24,2.55 | K3.2 71.65,23.35 69.03,23.35 59.06,13.37 | v79.82,2.56 79.66,2.56 79.65,2.57 60.89,2.57 | 60.89,2.57 60.14,2.57 59.06,3.65 | D3.A 60.89,2.57
  Bottom 0.305: 59.06,3.65 59.06,13.37
N$34
  Bottom 0.3: X2.2 95.33,150.27
  Bottom 0.813: 95.33,150.27 K2.P
N$35
  Bottom 0.3: 83.6,156.2 K2.O
  Bottom 0.813: X2.3 89.41,155.36 88.57,156.2 83.6,156.2
N$36
  Bottom 0.813: X2.1 90.65,145.35 89.6,144.3 K2.S
N$37
  Bottom 0.813: X1.3 90.45,128.68 89.54,129.59 83.55,129.59 K1.O
N$38
  Bottom 0.813: X1.1 89.62,118.67 88.61,117.66 K1.S
N$39
  Bottom 0.3: 69.36,123.67 K1.P
  Bottom 0.813: X1.2 69.36,123.67
N$40
  Bottom 0.3: T5.C 94.48,31.2 94.48,29.48 94,29 65.5,29 | K4.2 71.6,49.98 67.98,49.98 65.37,47.37 65.37,41.27 63.84,39.74 63.84,29.63 64.47,29 65.5,29 | D4.A 65.5,30.79 65.5,29
N$41
  Bottom 0.3: T5.B 91.15,30.33 90.46,31.02 90.46,34.71 89.01,36.17 81.4,36.17 80.12,37.45 R11.2
N$42
  Bottom 0.3: OK2.3 76.38,33.97 77.29,34.88 77.29,39.3 R11.1
N$43
  Bottom 0.3: OK2.1 80.36,31.43 79.16,30.24 71.61,30.24 71.35,30.49 R10.2
N$44
  Bottom 0.3: LED6.A 87.97,33.97 OK2.2
N$45
  Bottom 0.3: X5.2 95.63,44.07
  Bottom 0.813: 95.63,44.07 K4.P
N$46
  Bottom 0.3: 83.9,50 K4.O
  Bottom 0.813: X5.3 89.71,49.16 88.87,50 83.9,50
N$47
  Bottom 0.813: X5.1 90.95,39.15 89.9,38.1 K4.S
N$48
  Bottom 0.813: X3.3 90.75,22.48 89.84,23.39 83.85,23.39 K3.O
N$49
  Bottom 0.813: X3.1 89.92,12.47 88.91,11.46 K3.S
N$50
  Bottom 0.3: 69.66,17.47 K3.P
  Bottom 0.813: X3.2 69.66,17.47
N$51  (via drill 3)
  other vias: 97.13,96.73
N$52  (via drill 3)
  other vias: 3.52,96.73
N$53  (via drill 3)
  other vias: 3.56,3.17
N$54  (via drill 3)
  other vias: 97.08,3.31
N$55
  Bottom 0.3: IC6.12 37.73,45.75 33.65,45.75 29.69,41.78 Q2.2 23.15,41.78 C7.2
N$56
  Bottom 0.3: IC6.13 35.8,43.19 29.56,36.95 Q2.1 25.04,36.96 24.67,36.59 C6.2
PD0  (via drill 0.8 pad 1.8)
  Top 0.3: v12.76,124.23 12.77,124.22 12.77,115.72 v12.72,115.67
  Bottom 0.3: SV2.1 50.77,124.41 50.09,125.09 50.09,131.35 42.82,138.62 42.82,143.62 39.59,146.85 IC5.14 36.58,146.85 33.12,143.38 24.96,135.22 15.38,135.22 | v12.76,124.23 12.76,132.6 | v12.72,115.67 12.69,115.7 12.55,115.7 4.91,123.34 WEMOS1.D6
  Bottom 0.305: 15.38,135.22 12.76,132.6
PD1  (via drill 0.8 pad 1.8)
  Top 0.3: v29.43,117.61 v29.42,117.6 29.42,112.33 v29.46,112.37
  Bottom 0.3: IC5.15 37.33,144.31 29.43,136.41 v29.43,117.61 | 29.48,110.11 48.27,110.11 49.79,111.63 49.79,117.88 SV2.2 | 28.06,110.11 29.48,110.11 | v29.46,112.37 29.48,112.35 29.48,110.11
  Bottom 0.305: 28.06,110.11 25.27,112.89 20.34,112.89 16.1,117.12 13.03,117.12 6.55,123.61 6.55,125.18 5.86,125.88 WEMOS1.D5
PD2
  Bottom 0.3: IC5.16 39.34,141.77 41.06,140.05 41.06,138.39 43.61,135.84 | SV2.3 48.23,124.48 49.13,125.38 49.13,130.36 43.63,135.86 43.61,135.84 | R18.1 42.3,134.52 43.61,135.84
PD3  (via drill 0.8 pad 1.8)
  Top 0.3: v31.7,117.64 v31.7,112.32 v31.69,112.32 | v57.07,112.53 48.4,112.53 v48.26,112.67
  Bottom 0.3: IC5.17 35.16,139.23 31.7,135.77 v31.7,117.64 | v31.69,112.32 31.69,112.3 33.11,110.88 42.87,110.88 | LED1.K 81.29,108.1 80.58,107.38 59.78,107.38 57.05,110.11 57.05,112.51 v57.07,112.53
  Bottom 0.305: 42.87,110.88 46.32,114.33 48.26,114.33 | 48.26,114.33 v48.26,112.67 | 48.26,114.33 48.26,118.84 SV2.4
PD4  (via drill 0.8 pad 1.8)
  Top 0.3: v85.08,136.67 85.08,133.15 v85.11,133.12 | v58.27,125.85 58.24,125.88 47.14,125.88 v47.12,125.89
  Bottom 0.3: LED2.K 86.03,137.66 85.08,136.71 v85.08,136.67 | 71.01,133.23 85,133.23 v85.11,133.12 | 64.05,126.27 63.63,125.85 v58.27,125.85 | 40.37,128.13 40.37,135.6 39.28,136.69 IC5.18
  Bottom 0.305: 64.05,126.27 71.01,133.23 | v47.12,125.89 45.62,125.89 | 45.62,125.89 42.61,125.89 40.37,128.13 | SV2.5 45.7,125.82 45.62,125.89
PD5  (via drill 0.8 pad 1.8)
  Top 0.3: v33.98,117.57 34.02,117.53 34.02,112.34 v34.05,112.31
  Bottom 0.3: SV2.6 45.55,118.72 45.55,114.51 | v33.98,117.57 33.98,132.72 35.32,134.06 37.36,134.06 IC5.19
  Bottom 0.305: v34.05,112.31 43.36,112.31 45.55,114.51
PD6
  Bottom 0.3: SV2.7 43.16,123.36 37.45,129.06 IC5.20
PD7  (via drill 0.8 pad 1.8)
  Top 0.305: v51.34,114.37 v51.33,114.37 v43.14,114.37
  Bottom 0.3: SV2.8 43.18,118.84 43.18,114.41 v43.14,114.37
  Bottom 0.305: IC5.21 52.69,130.52 51.01,128.84 51.01,126.25 52.34,124.92 52.34,115.38 v51.34,114.37
PD8  (via drill 0.8 pad 1.8)
  Top 0.3: v85.38,30.47 85.38,26.95 v85.41,26.92 | v58.57,19.65 58.54,19.68 47.44,19.68 v47.42,19.69
  Bottom 0.3: LED6.K 86.33,31.46 85.38,30.51 v85.38,30.47 | 71.31,27.03 85.3,27.03 v85.41,26.92 | 64.35,20.07 63.93,19.65 v58.57,19.65 | 40.67,21.93 40.67,29.4 39.58,30.49 IC6.18
  Bottom 0.305: 64.35,20.07 71.31,27.03 | v47.42,19.69 45.92,19.69 | 45.92,19.69 42.91,19.69 40.67,21.93 | SV4.5 45.99,19.62 45.92,19.69
PD9  (via drill 0.8 pad 1.8)
  Top 0.3: v32,11.44 v32,6.12 v31.99,6.12 | v57.37,6.33 48.7,6.33 v48.56,6.47
  Bottom 0.3: IC6.17 35.46,33.03 32,29.57 v32,11.44 | v31.99,6.12 31.99,6.1 33.41,4.68 43.17,4.68 | LED3.K 81.59,1.9 80.88,1.18 60.08,1.18 57.35,3.91 57.35,6.31 v57.37,6.33
  Bottom 0.305: 43.17,4.68 46.62,8.13 48.56,8.13 | 48.56,8.13 v48.56,6.47 | 48.56,8.13 48.56,12.64 SV4.4
PD10
  Bottom 0.3: IC6.16 39.64,35.57 41.36,33.84 41.36,32.19 43.91,29.64 | SV4.3 48.53,18.28 49.43,19.18 49.43,24.16 43.93,29.66 43.91,29.64 | R5.1 42.6,28.32 43.91,29.64
PD11  (via drill 0.8 pad 1.8)
  Top 0.3: v13.06,18.03 13.07,18.02 13.07,9.52 v13.02,9.47
  Bottom 0.3: SV4.1 51.08,18.21 50.39,18.89 50.39,25.15 43.12,32.42 43.12,37.42 39.9,40.65 IC6.14 36.88,40.65 33.41,37.19 33.42,37.19 25.26,29.02 15.68,29.02 | v13.06,18.03 13.06,26.4 | v13.02,9.47 12.99,9.5 12.85,9.5 5.21,17.14 WEMOS2.D6
  Bottom 0.305: 15.68,29.02 13.06,26.4
PD12  (via drill 0.8 pad 1.8)
  Top 0.3: v29.73,11.41 v29.72,11.4 29.72,6.13 v29.76,6.17
  Bottom 0.3: IC6.15 37.63,38.11 29.73,30.21 v29.73,11.41 | 29.77,3.91 48.57,3.91 50.09,5.43 50.09,11.68 SV4.2 | 28.36,3.91 29.77,3.91 | v29.76,6.17 29.77,6.15 29.77,3.91
  Bottom 0.305: 28.36,3.91 25.57,6.69 20.64,6.69 16.4,10.92 13.33,10.92 6.85,17.41 6.85,18.98 6.16,19.68 WEMOS2.D5
PD13  (via drill 0.8 pad 1.8)
  Top 0.3: v34.28,11.37 34.32,11.33 34.32,6.14 v34.35,6.12
  Bottom 0.3: SV4.6 45.85,12.52 45.85,8.31 | v34.28,11.37 34.28,26.52 35.62,27.86 37.66,27.86 IC6.19
  Bottom 0.305: v34.35,6.12 43.66,6.12 45.85,8.31
PD14
  Bottom 0.3: SV4.7 43.45,17.16 37.75,22.86 IC6.20
PD15  (via drill 0.8 pad 1.8)
  Top 0.305: v51.63,8.17 v43.44,8.17
  Bottom 0.3: SV4.8 43.48,12.64 43.48,8.21 v43.44,8.17
  Bottom 0.305: IC6.21 52.99,24.32 51.31,22.64 51.31,20.06 52.64,18.72 52.64,9.17 v51.63,8.17
RST
  Bottom 0.3: SV1.5 10.78,161.32 12.08,162.62 17.75,162.62 20.99,159.38 | 20.99,159.38 21.97,158.4 33.33,158.4 34.48,159.55 IC5.9 | S1.1 8.7,149.66 | 8.7,149.66 S1.2 | 8.7,149.66 8.7,151.16 10.06,152.52 16.27,152.52 19.97,156.22 19.97,157.64 | 19.97,157.64 19.97,158.35 20.99,159.38 | R1.1 19.96,157.63 19.97,157.64
RST1
  Bottom 0.3: SV3.5 11.08,55.12 12.38,56.42 18.05,56.42 21.29,53.18 | 21.29,53.18 22.27,52.2 33.63,52.2 34.78,53.35 IC6.9 | S3.1 9,43.46 | 9,43.46 S3.2 | 9,43.46 9,44.96 10.36,46.32 16.57,46.32 20.27,50.02 20.27,51.44 | 20.27,51.44 20.27,52.15 21.29,53.18 | R4.1 20.26,51.43 20.27,51.44
SCK
  Bottom 0.3: SV1.7 18.09,163.86 22.29,159.66 32.73,159.66 35.16,162.09 IC5.8
SCK1
  Bottom 0.3: SV3.7 18.39,57.66 22.59,53.46 33.03,53.46 35.46,55.89 IC6.8

## Text on the board
tPlace: G | V | A0 | G | V | sda | scl | V | G | G | G | V | A0 | G | V | sda | scl | V | G | G